# Altium PCB 6C-2L-1550um.PcbDoc
Units mm, origin at the board's own origin, x right, y up, seen from the top; angles counter-clockwise.
Board outline 30 x 15 mm, 2 copper layers (Top Layer, Bottom Layer), stack 1.586 mm thick; 3 components, 4 nets, 12 pads, 0 vias.
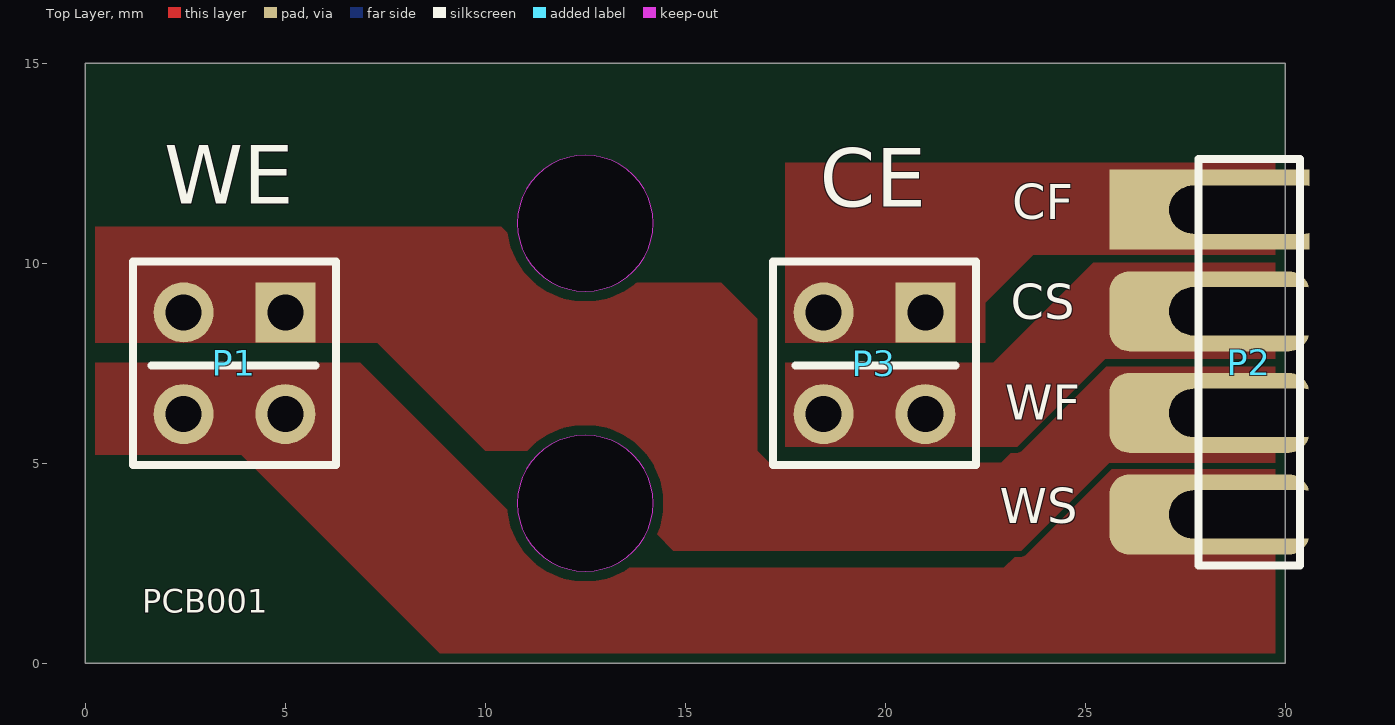
[diagram p0: Top Layer view]
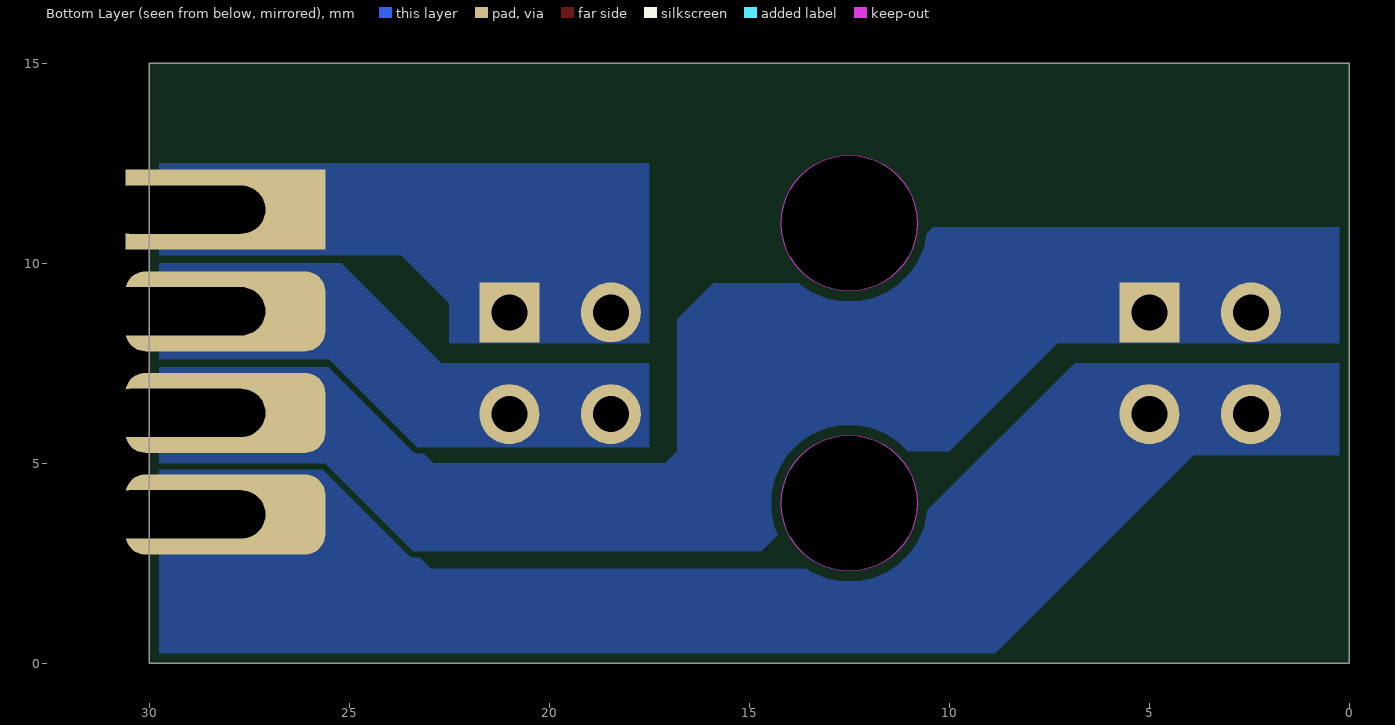
[diagram p1: Bottom Layer view, seen from below]

## Layer stack, top to bottom
Top Solder: solder mask 0.0102, Solder Resist, Dk 3.5
Top Layer: signal copper 0.018
Dielectric1: core 1.55, FR-4, Dk 4.8
Bottom Layer: signal copper 0.018
Bottom Solder: solder mask 0.0102, Solder Resist, Dk 3.5

## Board outline
0,0 30,0 30,15 0,15
cut-out: 10.8,11 ccw(c12.5,11) 12.5,9.3 ccw(c12.5,11) 14.2,11 ccw(c12.5,11) 12.5,12.7 ccw(c12.5,11)
cut-out: 10.8,4 ccw(c12.5,4) 12.5,2.3 ccw(c12.5,4) 14.2,4 ccw(c12.5,4) 12.5,5.7 ccw(c12.5,4)

## Design rules (kind name [scope] priority, off if disabled: settings)
BoardOutlineClearance [All] p1: gap=0.25 ignorepadtopadclearanceinfootprint=FALSE except(0: Arc-SplitContinuation Track-SplitContinuation SMDPad-SplitContinuation THPad-SplitContinuation Via-SplitContinuation Fill-SplitContinuation Poly-SplitContinuation Region-SplitContinuation Text-SplitContinuation)
Clearance Clearance-xPP-xTP-xTT [All] p1: gap=0.15 ignorepadtopadclearanceinfootprint=FALSE except(0: Arc-Hole Track-Hole SMDPad-Hole THPad-Hole Via-Hole Fill-Hole Poly-Hole Region-Hole Text-Hole)
ComponentClearance [All] p1: gap=0.25 collisioncheckmode=3 verticalgap=0.25 showdistances=FALSE
DiffPairsRouting [All] p1: maxlimit=0.25 minlimit=0.25 mostfreqgap=0.25 toplayer_minwidth=0.381 toplayer_maxwidth=0.381 toplayer_prefwidth=0.381 bottomlayer_minwidth=0.381 bottomlayer_maxwidth=0.381 bottomlayer_prefwidth=0.381 maxuncoupledlength=12.5
Height [All] p1: minheight=0 maxheight=25 prefheight=12.5
HoleSize HoleSize-PTH [All] p1: absolutevalues=TRUE maxlimit=2 minlimit=0.25 maxpercent=80.000 minpercent=20.000
HoleToHoleClearance [All] p1: gap=0.35 allowstackedmicrovias=TRUE
MinimumAnnularRing "Minimum IAR  >0.45mm" [((ObjectKind = 'Pad') OR (ObjectKind = 'Via')) And (Layer = 'MultiLayer') And (HoleDiameter > AsMM(0.45))] p1: minimumring=0.175 // minimum inner annular ring for pads > 0.45mm finished hole size
MinimumAnnularRing "Minimum IAR <=0.45mm" [((ObjectKind = 'Pad') OR (ObjectKind = 'Via')) And (Layer = 'MultiLayer') And (HoleDiameter <= AsMM(0.45))] p2: minimumring=0.175 // minimum inner annular ring for pads <= 0.45mm finished hole size
MinimumSolderMaskSliver [All] p1: minsoldermaskwidth=0.08
PlaneClearance PlaneClearance-IPI [All] p1: clearance=0.25
PlaneConnect [All] p1: planeconnectstyle=Relief reliefexpansion=0.175 reliefentries=4 reliefconductorwidth=0.2 reliefairgap=0.2
PolygonConnect PolygonConnect-xTW [All] p1: connectstyle=Direct reliefconductorwidth=0.2 reliefentries=4 polygonreliefangle="90 Angle" airgapwidth=0.2
RoutingCorners [All] p1: cornerstyle=45-Degree minsetback=2.5 maxsetback=2.5
RoutingVias "RoutingVias > 0.45mm" [(ObjectKind = 'Via') And (HoleDiameter > AsMM(0.45))] p1: holewidth=0.5 width=0.85 viastyle="Through Hole" minholewidth=0.5 minwidth=0.85 maxholewidth=0.9 maxwidth=1.25 // finishet hole size > 0.45mm
RoutingVias "RoutingVias <= 0.45mm" [(ObjectKind = 'Via') And (HoleDiameter <= AsMM(0.45))] p2: holewidth=0.3 width=0.65 viastyle="Through Hole" minholewidth=0.25 minwidth=0.6 maxholewidth=0.45 maxwidth=0.8 // finishet hole size <= 0.45mm
SilkToSilkClearance [All] p1: silktosilkclearance=0.2
SilkToSolderMaskClearance SilkscreenOverComponentPads [IsPad] p1: minsilkscreentomaskgap=0.2 clearancetoexposedcopper=TRUE
SolderMaskExpansion [All] p1: expansion=0 istentingtop=FALSE
UnRoutedNet [All] p1: checkbadconnections=TRUE
Width Width-xTW [All] p1: maxlimit=1.5 minlimit=0.15 preferedwidth=0.2
18 further rules are at their usual default settings.

## Components (designator, comment, footprint, x,y, rotation, side; value= is the part's Value field where it differs from the comment)
P1 "Header 2X2" HDR2X2 5,8.77 r180 top
P2 "Header 4" HDR1X4 29.1,11.34 r270 top
P3 "Header 2X2" HDR2X2 21,8.77 r180 top

## Footprints (in the part's own frame and the unit in brackets; to place one, negate y for a bottom-side part, rotate by r counter-clockwise, add the part's x,y. Pads: shape width x height; smd on the part's side, far side on the other; paste and mask are expansions set on the pad)
HDR1X4 [mm] "Connector; Header; 4 Position"
  rect 2x5 hole 1.2 slot 4 at 90 deg copper offset 0,-1: 1(0,0)
  rrect50% 2x5 hole 1.2 slot 4 at 90 deg copper offset 0,-1: 2(2.54,0) 3(5.08,0) 4(7.62,0)
  silkscreen extent -1.27,-1.27 8.89,1.27
HDR2X2 [mm] "Connector; Header; 2x2 Position"
  rect 1.5x1.5 hole 0.9: 1(0,0)
  round 1.5 hole 0.9: 2(0,2.54) 3(2.54,0) 4(2.54,2.54)
  silkscreen extent -1.27,-1.27 3.81,3.81

## Part data
P1 P3: "Header, 2-Pin, Dual row", LatestRevisionDate=17-Jul-2002, LatestRevisionNote="Re-released for DXP Platform.", Publisher="Altium Limited"
P2: "Header, 4-Pin", LatestRevisionDate=17-Jul-2002, LatestRevisionNote="Re-released for DXP Platform.", Publisher="Altium Limited"

## Nets (pads, with @x,y where several pads share a name; then routed paths per layer and width w, separated by ;. In a path a pad name is that pad's centre, name@x,y a point inside that pad or via, vN(x,y) a via of type N, cw(c..) or ccw(c..) an arc to the next point about the centre after c; other vN are vias at no path point)
Coin1_Force: P1.1 P1.3 P2.3
Coin1_Sense: P1.2 P1.4 P2.4
Coin2_Force: P2.1 P3.1 P3.3
Coin2_Sense: P2.2 P3.2 P3.4

## Polygon pours and split planes (outlines as drawn)
Coin1_Sense on Top Layer "NONET_L-01_P-001" (solid, pour order 11): -0.3,7.519 6.869,7.519 12.004,2.385 22.965,2.385 25.6,5.019 31.1,5.019 31.1,-0.281 9.4,-0.281 3.9,5.219 -0.3,5.219
Coin1_Force on Top Layer "NONET_L-01_P-001" (solid, pour order 10): -0.3,8.019 7.3,8.019 10,5.319 12.2,5.319 14.7,2.819 23.4,2.819 25.6,5.019 31.1,5.019 31.1,6.919 30.6,7.419 25.3,7.419 22.9,5.019 17.1,5.019 16.8,5.319 16.8,8.619 15.9,9.519 11.8,9.519 10.4,10.919 -0.3,10.919
Coin2_Sense on Top Layer "NONET_L-01_P-001" (solid, pour order 9): 17.5,7.519 22.7,7.519 25.2,10.019 31.8,10.019 31.8,8.319 31.1,7.619 25.5,7.619 23.3,5.419 17.5,5.419
Coin2_Force on Top Layer "NONET_L-01_P-001" (solid, pour order 8): 17.5,8.019 17.5,12.519 30.9,12.519 31.1,12.319 31.1,11.219 30.1,10.219 23.7,10.219 22.5,9.019 22.5,8.019
Coin2_Force on Bottom Layer "NONET_L-01_P-001" (solid, pour order 0): 17.5,8 17.5,12.5 30.9,12.5 31.1,12.3 31.1,11.2 30.1,10.2 23.7,10.2 22.5,9 22.5,8
Coin2_Sense on Bottom Layer "NONET_L-01_P-001" (solid, pour order 1): 17.5,7.5 22.7,7.5 25.2,10 31.8,10 31.8,8.3 31.1,7.6 25.5,7.6 23.3,5.4 17.5,5.4
Coin1_Force on Bottom Layer "NONET_L-01_P-001" (solid, pour order 2): -0.3,8 7.3,8 10,5.3 12.2,5.3 14.7,2.8 23.4,2.8 25.6,5 31.1,5 31.1,6.9 30.6,7.4 25.3,7.4 22.9,5 17.1,5 16.8,5.3 16.8,8.6 15.9,9.5 11.8,9.5 10.4,10.9 -0.3,10.9
Coin1_Sense on Bottom Layer "NONET_L-01_P-001" (solid, pour order 3): -0.3,7.5 6.869,7.5 12.004,2.365 22.965,2.365 25.6,5 31.1,5 31.1,-0.3 9.4,-0.3 3.9,5.2 -0.3,5.2

## Silkscreen, mask and mechanical layers (free items; w line width, h text height)
Top Overlay:
  lines w0.2: 1.65,7.45 5.75,7.45 ; 17.75,7.45 21.75,7.45
  text "WE" at 1.97,11 h2.5
  text "CE" at 18.362,10.928 h2.5
  text "CF" at 23.17,10.817 h1.5
  text "CS" at 23.137,8.317 h1.5
  text "WF" at 22.995,5.8 h1.5
  text "WS" at 22.863,3.217 h1.5
  text "PCB001" at 1.427,1.061 h1
Dimensions:
  the board outline again, w0.2